# Altium PCB MLX90393_demo.PcbDoc
Units mil, origin at the board's own origin, x right, y up, seen from the top; angles counter-clockwise.
Board outline 1900 x 1000 mil, 2 copper layers (Top Layer, Bottom Layer), stack 57.918 mil thick; 14 components, 27 nets, 59 pads, 140 vias.
Unrouted connection lines stored in the file: 1.
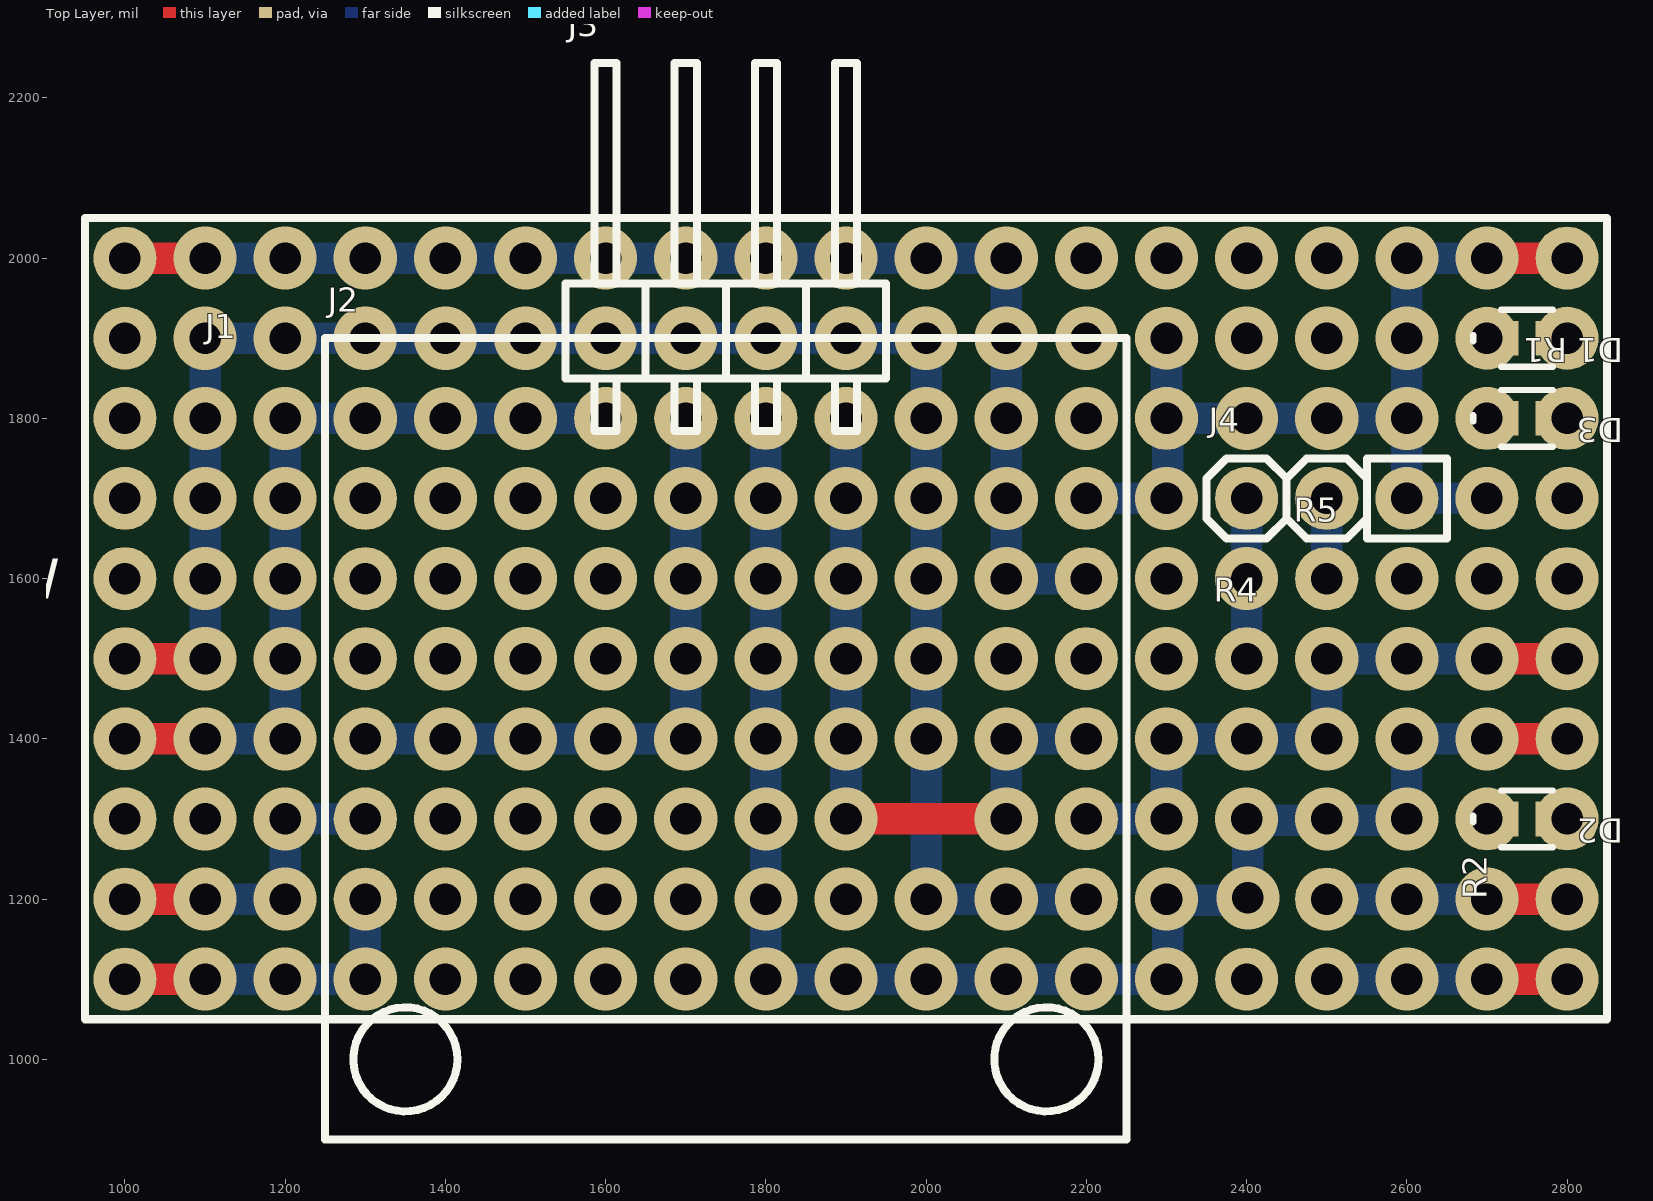
[diagram p0: Top Layer view]
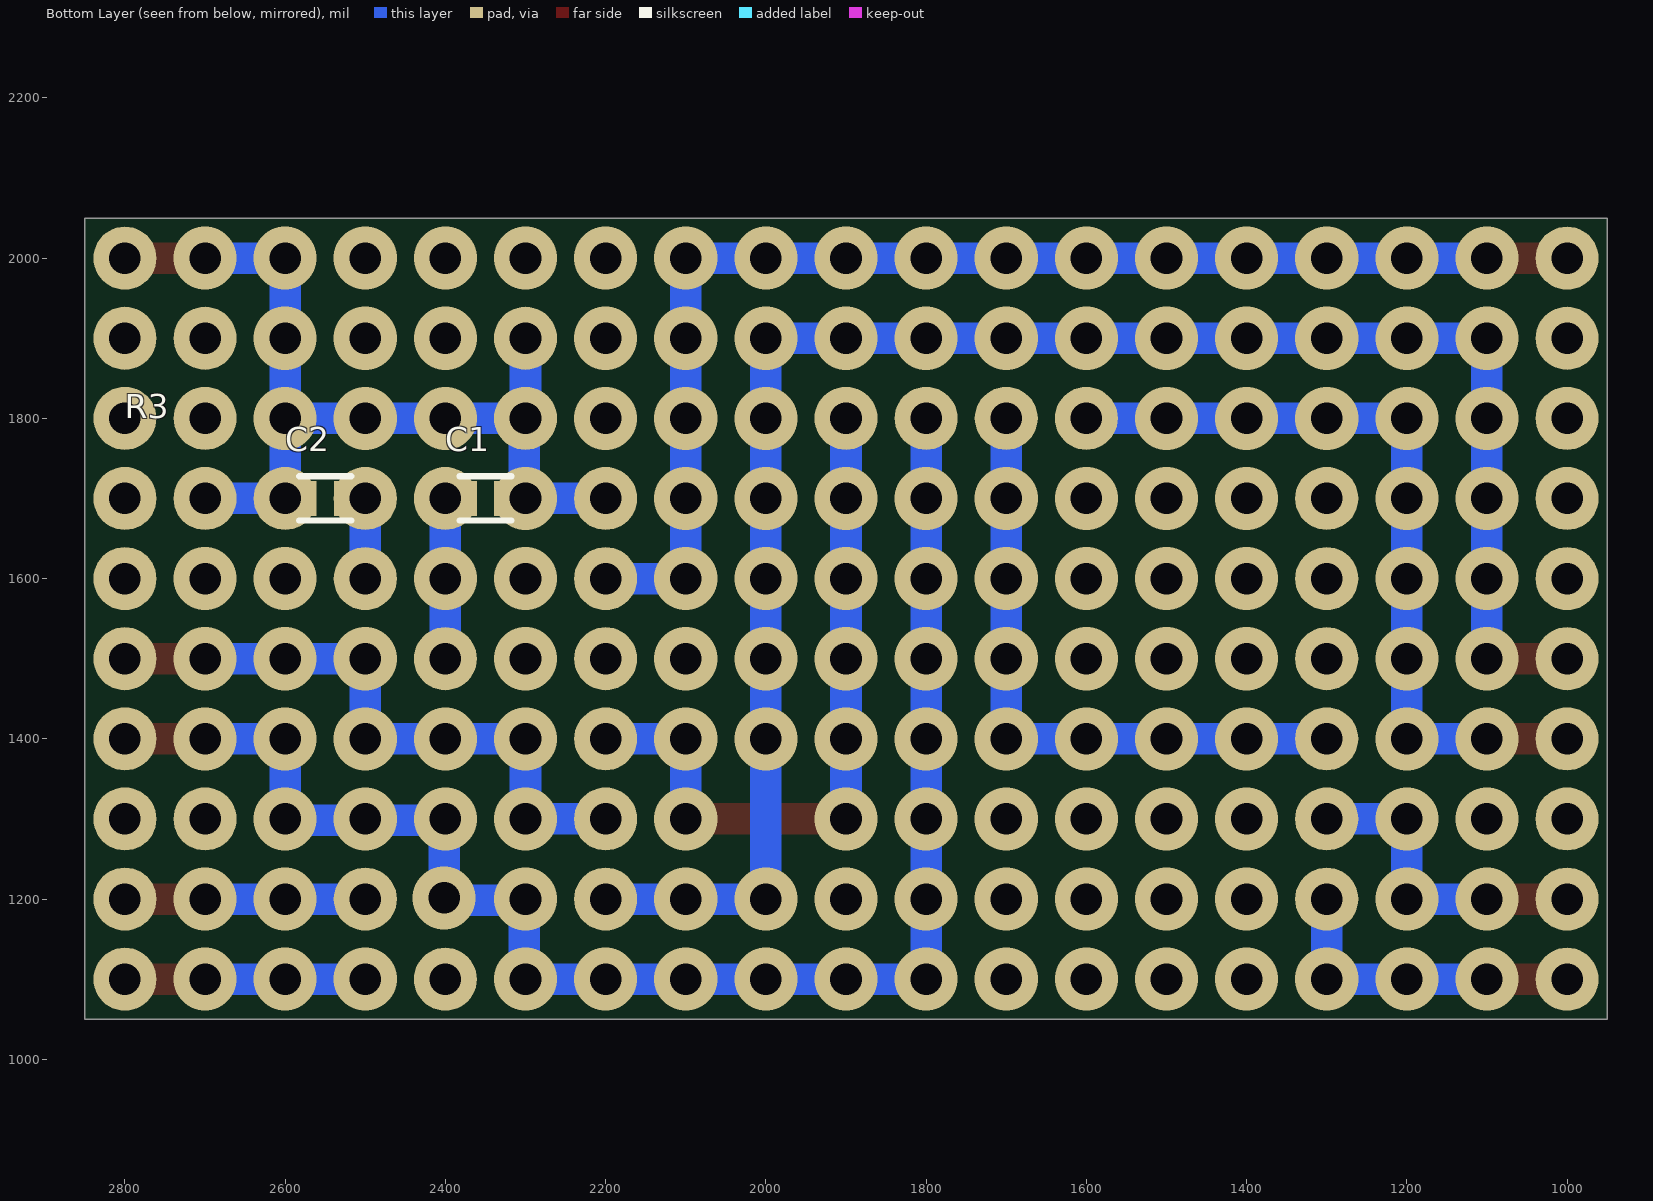
[diagram p1: Bottom Layer view, seen from below]

## Layer stack, top to bottom
Top Solder: solder mask 0.4, Solder Resist, Dk 3.5
Top Layer: signal copper 1.4
Dielectric 1: dielectric 55.1181, FR-4, Dk 4.8
Bottom Layer: signal copper 1.4
Bottom Solder: solder mask 0.4, Solder Resist, Dk 3.5

## Board outline
950,1050 2850,1050 2850,2050 950,2050

## Design rules (kind name [scope] priority, off if disabled: settings)
Clearance [All] p1: gap=19.68 ignorepadtopadclearanceinfootprint=FALSE except(0: Arc-Hole Track-Hole SMDPad-Hole THPad-Hole Via-Hole Fill-Hole Poly-Hole Region-Hole Text-Hole; 39.37: Arc-THPad Arc-Via Arc-Fill Arc-Poly Arc-Region Arc-Text Track-THPad Track-Via Track-Fill Track-Poly Track-Region Track-Text; 59.06: Arc-Arc Arc-Track Track-Track)
ComponentClearance [All] p1: gap=1.57 collisioncheckmode=3 verticalgap=10 showdistances=FALSE
PolygonConnect [All] p1: connectstyle=Relief reliefconductorwidth=10 reliefentries=4 polygonreliefangle="90 Angle" airgapwidth=10
RoutingVias [All] p1: holewidth=39.37 width=78.74 viastyle="Through Hole" minholewidth=39.37 minwidth=78.74 maxholewidth=39.37 maxwidth=78.74
SolderMaskExpansion [All] p1: expansion=4 istentingtop=FALSE
Width [All] p1: maxlimit=39.37 minlimit=39.37 preferedwidth=39.37 minimp=50.000000 maximp=50.000000 favimp=50.000000
29 further rules are at their usual default settings.

## Components (designator, comment, footprint, x,y, rotation, side; value= is the part's Value field where it differs from the comment)
C1 "10u" C_0603_S 2350,1700 r180 bottom
C2 "10u" C_0603_S 2550,1700 r0 bottom
D1 "blue" LED_0603_S_BLUE 2750,1900 r0 top
D2 "white" LED_0603_S 2750,1300 r0 top
D3 "yellow" LED_0603_S_YELLOW 2750,1800 r0 top
J1 "MSP-EXP430G2" MSP-EXP430G2 1000,2000 r0 top locked
J2 "Sparkfun MLX90393" "SPARKFUN MLX90393" 2200,1200 r180 top locked
J3 "Jumper_4" JUMPER_4 1900,1800 r180 top
J4 "Jumper_3" Jumper_3 2600,1700 r270 top
R1 "470" R_conv_400mil 2700,1900 r180 top
R2 "470" R_conv_400mil 2700,1300 r90 top
R3 "470" R_conv_400mil 2700,1800 r180 bottom
R4 "100" R_conv_400mil 2400,1100 r90 top
R5 "100" R_conv_400mil 2500,1200 r90 top

## Footprints (in the part's own frame and the unit in brackets; to place one, negate y for a bottom-side part, rotate by r counter-clockwise, add the part's x,y. Pads: shape width x height; smd on the part's side, far side on the other; paste and mask are expansions set on the pad)
C_0603_S [mm]
  rect 1.1x1.1 smd: 1(-0.825,0) 2(0.825,0)
  silkscreen extent -0.82,-0.7 0.82,0.7, body extent -0.8,-0.4 0.8,0.4, height 0.8
Jumper_3 [mm]
  round 2 hole 1: 1(0,0) 2(0,-2.54) 3(0,-5.08)
  silkscreen extent -1.27,-6.35 1.27,1.27, body extent -1.27,-6.35 1.27,7.62, height 10
JUMPER_4 [mm]
  round 2 hole 1: 1(0,0) 2(2.54,0) 3(5.08,0) 4(7.62,0)
  silkscreen extent -1.27,-11.27 8.89,0.4, body extent -1.27,-11.27 8.89,0.35, height 2.54
LED_0603_S [mm]
  rect 1.1x1.1 smd: A(0.825,0) K(-0.825,0)
  silkscreen extent -1.7,-0.9 0.82,0.9, body extent -0.8,-0.4 0.8,0.4, height 1.25
LED_0603_S_BLUE [mm]
  rect 1.1x1.1 smd: A(0.825,0) K(-0.825,0)
  silkscreen extent -1.7,-0.9 0.82,0.9, body extent -0.8,-0.4 0.8,0.4, height 1.25
LED_0603_S_YELLOW [mm]
  rect 1.1x1.1 smd: A(0.825,0) K(-0.825,0)
  silkscreen extent -1.7,-0.9 0.82,0.9, body extent -0.8,-0.4 0.8,0.4, height 1.25
MSP-EXP430G2 [mm]
  round 2 hole 1: 1(0,0) 2(0,-2.54) 3(0,-5.08) 4(0,-7.62) 5(0,-10.16) 6(0,-12.7) 7(0,-15.24) 8(0,-17.78) 9(0,-20.32) 10(0,-22.86) 11(45.72,-22.86) 12(45.72,-20.32) 13(45.72,-17.78) 14(45.72,-15.24) 15(45.72,-12.7) 16(45.72,-10.16) 17(45.72,-7.62) 18(45.72,-5.08) 19(45.72,-2.54) 20(45.72,0)
  silkscreen extent -1.27,-24.13 46.99,1.27, body extent -1.27,-24.13 46.99,1.27, height 1
R_conv_400mil [mm]
  round 2 hole 1: 1(0,0) 2(10.16,0)
  body extent -0.25,-1.25 10.41,1.25, height 2.74
"SPARKFUN MLX90393" [mm]
  round 2 hole 1: 1(0,0) 2(0,-2.54) 3(0,-5.08) 4(0,-7.62) 5(0,-10.16) 6(0,-12.7) 7(22.86,-12.7) 8(22.86,-10.16) 9(22.86,-7.62) 10(22.86,-5.08) 11(22.86,-2.54) 12(22.86,0)
  silkscreen extent -1.27,-17.78 24.13,7.62, body extent -1.27,-17.78 24.13,7.62, height 6.5

## Part data
C1 C2: library part C
D1 D2 D3: library part LED
R1 R2 R3 R4 R5: library part R, "Normaler Widerstand"

## Via types
v1: diameter 78.74, hole 39.37, Top Layer to Bottom Layer, 140 vias

## Nets (pads, with @x,y where several pads share a name; then routed paths per layer and width w, separated by ;. In a path a pad name is that pad's centre, name@x,y a point inside that pad or via, vN(x,y) a via of type N, cw(c..) or ccw(c..) an arc to the next point about the centre after c; other vN are vias at no path point)
A_Out_0: C1.1 J4.3 R4.2 | length 200
  Bottom Layer w39.37: R4.2 v1(2400,1600) J4.3
A_Out_1: C2.1 J4.2 R5.2 | length 100
  Bottom Layer w39.37: R5.2 J4.2
CLK: J1.7 J3.4 | length 1000
  Top Layer w39.37: J1.7 v1(1100,1400)
  Bottom Layer w39.37: v1(1100,1400) v1(1200,1400) v1(1200,1800) J3.4
  other v1: 1200,1500 1200,1600 1200,1700 1300,1800 1400,1800 1500,1800
CS: J1.6 J2.1 | length 2300
  Top Layer w39.37: J1.6 v1(1100,1500)
  Bottom Layer w39.37: v1(1100,1500) v1(1100,1900) v1(2000,1900) v1(2000,1200) J2.1
  other v1: 2100,1200 2000,1400 2000,1500 1100,1600 2000,1600 1100,1700 2000,1700 1100,1800 2000,1800 1200,1900 1300,1900 1400,1900 1500,1900 1600,1900 1700,1900 1800,1900 1900,1900
GND: C1.2 C2.2 J1.20 J2.6 J4.1 R1.2 R2.2 R3.2 | length 1200.7
  Top Layer w39.37: v1(2700,2000) J1.20
  Bottom Layer w39.37: J2.6 v1(2300,1700) ; R1.2 R3.2 ; C1.2@2301.57,1700 2301.57,1798.43 R3.2 ; R2.2 J4.1 v1(2600,1800) ; v1(2700,2000) v1(2600,2000) v1(2600,1900) v1(2600,1800) ; R3.2 v1(2400,1800) v1(2500,1800) v1(2600,1800)
INT: J1.9 J2.11 | length 400
  Top Layer w39.37: J1.9 v1(1100,1200)
  Bottom Layer w39.37: v1(1100,1200) v1(1200,1200) v1(1200,1300) J2.11
"LED blue": D1.A J1.19
"LED green": J1.2
"LED red": J1.8
"LED white": D2.A J1.13
"LED yellow": D3.A J1.18
MISO: J2.3 J3.1 | length 900
  Top Layer w39.37: v1(1900,1300) v1(2100,1300)
  Bottom Layer w39.37: v1(1900,1300) J3.1 ; v1(2100,1300) v1(2100,1400) J2.3
  other v1: 1900,1400 1900,1500 1900,1600 1900,1700
MISO/SCL: J1.14 J3.2 | length 1996.3
  Top Layer w39.37: v1(2700,1400) J1.14
  Bottom Layer w39.37: J3.2 v1(1800,1700) v1(1800,1600) v1(1800,1500) v1(1800,1400) v1(1800,1300) v1(1800,1200) v1(1800,1100) v1(1900,1100) v1(2000,1100) v1(2100,1100) v1(2200,1100) v1(2300,1100) 2301.57,1101.57 2301.57,1198.43 2398.43,1198.43 v1(2401.57,1201.57) 2401.57,1298.43 2500,1298.43 2540.77,1298.43 2598.43,1298.43 v1(2600,1300) v1(2600,1400) v1(2700,1400)
  other v1: 2300,1200 2400,1300 2500,1300
MOSI/SDA: J1.15 J2.2 | length 800
  Top Layer w39.37: v1(2700,1500) J1.15
  Bottom Layer w39.37: J2.2 v1(2300,1300) v1(2300,1400) v1(2400,1400) v1(2500,1400) v1(2500,1500) v1(2700,1500)
  other v1: 2600,1500
NetD1_K: D1.K R1.1
NetD2_K: D2.K R2.1 | length 0
NetD3_K: D3.K R3.1
PWM0: J1.11 R4.1 | length 300
  Top Layer w39.37: v1(2700,1100) J1.11
  Bottom Layer w39.37: v1(2500,1100) v1(2600,1100) v1(2700,1100)
PWM1: J1.12 R5.1 | length 300
  Top Layer w39.37: v1(2700,1200) J1.12
  Bottom Layer w39.37: R5.1 v1(2600,1200) v1(2700,1200)
RST: J1.16
RXD: J1.3
SCL/SCLK: J2.10 J3.3 | length 800
  Bottom Layer w39.37: J2.10 v1(1400,1400) v1(1700,1400) v1(1700,1700) J3.3
  other v1: 1500,1400 1600,1400 1700,1500 1700,1600
SW: J1.5
TEST: J1.17
TRIG: J1.10 J2.12 | length 400
  Top Layer w39.37: J1.10 v1(1100,1100)
  Bottom Layer w39.37: v1(1100,1100) v1(1300,1100) J2.12
  other v1: 1200,1100
TXD: J1.4
VCC: J1.1 J2.5 | length 1600
  Top Layer w39.37: J1.1 v1(1100,2000)
  Bottom Layer w39.37: v1(1100,2000) v1(2100,2000) v1(2100,1600) J2.5
  other v1: 2100,1700 2100,1800 2100,1900 1200,2000 1300,2000 1400,2000 1500,2000 1600,2000 1700,2000 1800,2000 1900,2000 2000,2000
pads on no net: J2.4 J2.7 J2.8 J2.9
copper on no net:
  other v1: 1400,1100 1500,1100 1600,1100 1700,1100 1400,1200 1500,1200 1600,1200 1700,1200 1900,1200 1100,1300 1400,1300 1500,1300 1600,1300 1700,1300 1400,1500 1500,1500 1600,1500 2100,1500 2300,1500 1400,1600 1500,1600 1600,1600 2300,1600 2600,1600 2700,1600 1400,1700 1500,1700 1600,1700 2200,1800 2200,1900 2400,1900 2500,1900 2200,2000 2300,2000 2400,2000 2500,2000

## Silkscreen, mask and mechanical layers (free items; w line width, h text height)
Top Overlay:
  text "VCC" at 756.71,1975.01 h50
  text "GND" at 2910,1975.01 h50
  text "LED green" at 456.81,1883.34 h50
  text "LED blue" at 2910,1875.01 h50
  text "LED yellow" at 2910,1783.34 h50
  text "RXD" at 756.71,1775.01 h50
  text "TXD" at 756.71,1675.01 h50
  text "TEST" at 2910,1675.01 h50
  text "SW" at 806.69,1575.01 h50
  text "RST" at 2910,1575.01 h50
  text "CS" at 806.69,1475.01 h50
  text "MOSI/SDA" at 2910,1475.01 h50
  text "CLK" at 756.71,1375.01 h50
  text "MISO/SCL" at 2910,1375.01 h50
  text "LED red" at 556.77,1275.01 h50
  text "LED white" at 2910,1275.01 h50
  text "INT" at 765.04,1175.01 h50
  text "PWM1" at 2910,1175.01 h50
  text "TRIG" at 715.06,1075.01 h50
  text "PWM0" at 2910,1075.01 h50
Mechanical 1:
  the board outline again, w10